# Altium PCB LedFlex.PcbDoc
Units mm, origin at the board's own origin, x right, y up, seen from the top; angles counter-clockwise.
Board outline 100 x 100 mm, 4 copper layers (Top Layer, 5V, GND, Bottom Layer), stack 0.603 mm thick; 100 components, 204 nets, 800 pads, 0 vias.
Unrouted connection lines stored in the file: 596.
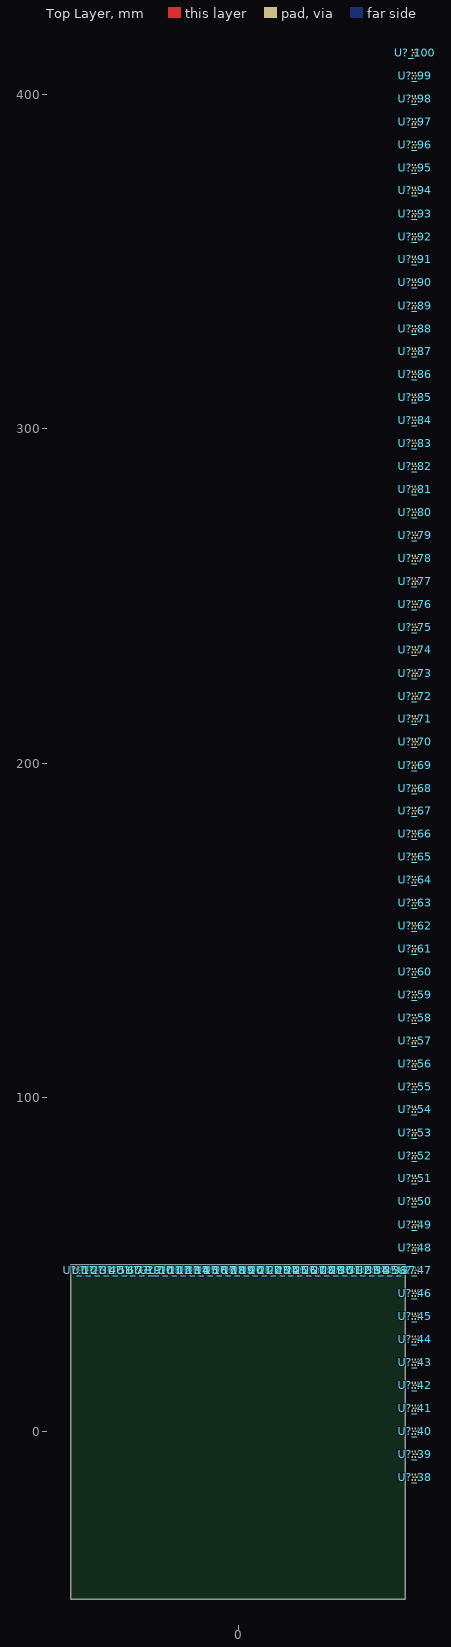
[diagram p0: Top Layer view]
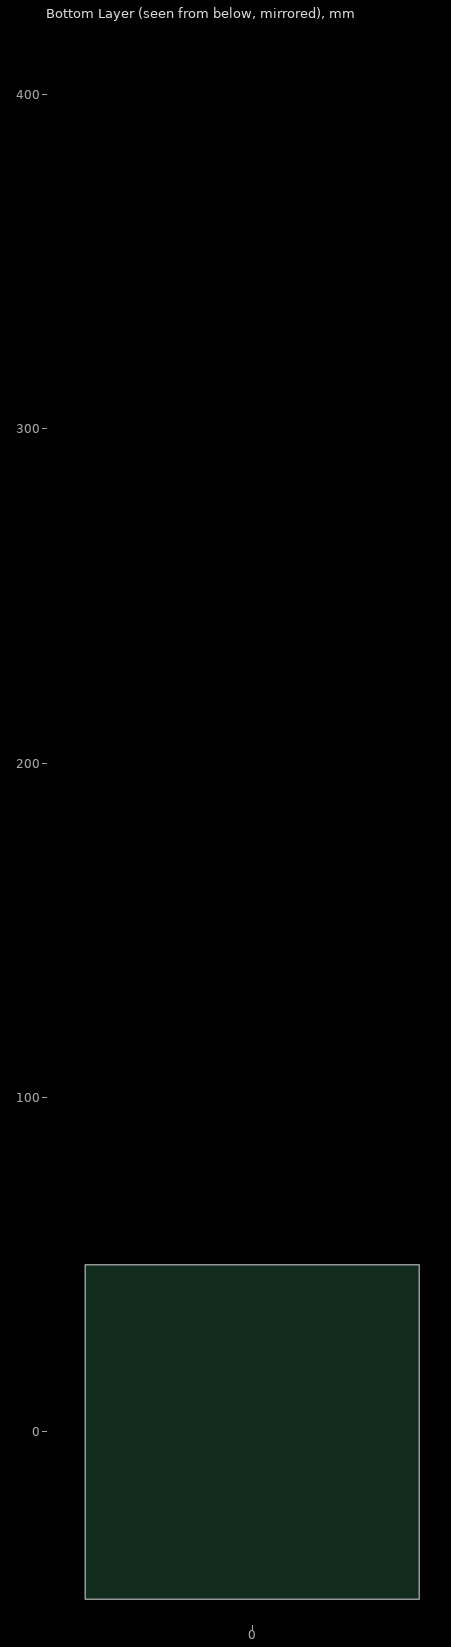
[diagram p1: Bottom Layer view, seen from below]

## Layer stack, top to bottom
Top Solder: solder mask 0.0102, Solder Resist, Dk 3.5
Top Layer: signal copper 0.0356
Dielectric 2: prepreg 0.0711, PP-006, Dk 4.1
5V: signal copper 0.035
Dielectric 1: dielectric 0.32, FR-4, Dk 4.8
GND: signal copper 0.035
Dielectric 3: prepreg 0.0711, PP-006, Dk 4.1
Bottom Layer: signal copper 0.0356
Bottom Solder: solder mask 0.0102, Solder Resist, Dk 3.5

## Board outline
-50,-50 -50,50 50,50 50,-50

## Design rules (kind name [scope] priority, off if disabled: settings)
BoardOutlineClearance [All] p1: gap=0.512 ignorepadtopadclearanceinfootprint=FALSE
Clearance [All] p1: gap=0.1 ignorepadtopadclearanceinfootprint=TRUE except(0: Arc-Hole Track-Hole SMDPad-Hole THPad-Hole Via-Hole Fill-Hole Poly-Hole Region-Hole Text-Hole)
HoleSize [All] p1: absolutevalues=TRUE maxlimit=15 minlimit=0.025 maxpercent=80.000 minpercent=20.000
PolygonConnect [IsPolygon and not IsNamedPolygon('PolygonDirect')] p1: thpad.connectstyle=Relief thpad.reliefconductorwidth=0.254 thpad.reliefentries=4 thpad.polygonreliefangle="90 Angle" thpad.airgapwidth=0.254 smdpad.connectstyle=Relief smdpad.reliefconductorwidth=0.254 smdpad.reliefentries=4 smdpad.polygonreliefangle="90 Angle" smdpad.airgapwidth=0.254 via.connectstyle=Direct via.reliefconductorwidth=0.254 via.reliefentries=4 via.polygonreliefangle="90 Angle" via.airgapwidth=0.254
PolygonConnect PolygonDirect [(IsNamedPolygon('PolygonDirect'))] p2: connectstyle=Direct reliefconductorwidth=0.254 reliefentries=4 polygonreliefangle="90 Angle" airgapwidth=0.254
RoutingVias [All] p1: holewidth=0.35 width=0.7 viastyle="Through Hole" minholewidth=0.3 minwidth=0.4 maxholewidth=2 maxwidth=2.5
SilkToSilkClearance [All] p1: silktosilkclearance=0.1
SolderMaskExpansion [All] p1: expansion=0.102 istentingtop=FALSE
SupplyNets "Schematic Supply Nets_1" [InNet('5V')] p1: voltage=0.000
SupplyNets "Schematic Supply Nets" [InNet('GND')] p2: voltage=0.000
Width [All] p1: maxlimit=5 minlimit=0.128 preferedwidth=0.254
28 further rules are at their usual default settings.

## Classes and differential pairs
component class U_APA102100: U?_100
component class U_APA10299: U?_99
component class U_APA10298: U?_98
component class U_APA10297: U?_97
component class U_APA10296: U?_96
component class U_APA10295: U?_95
component class U_APA10294: U?_94
component class U_APA10293: U?_93
component class U_APA10292: U?_92
component class U_APA10291: U?_91
component class U_APA10290: U?_90
component class U_APA10289: U?_89
component class U_APA10288: U?_88
component class U_APA10287: U?_87
component class U_APA10286: U?_86
component class U_APA10285: U?_85
component class U_APA10284: U?_84
component class U_APA10283: U?_83
component class U_APA10282: U?_82
component class U_APA10281: U?_81
component class U_APA10280: U?_80
component class U_APA10279: U?_79
component class U_APA10278: U?_78
component class U_APA10277: U?_77
component class U_APA10276: U?_76
component class U_APA10275: U?_75
component class U_APA10274: U?_74
component class U_APA10273: U?_73
component class U_APA10272: U?_72
component class U_APA10271: U?_71
component class U_APA10270: U?_70
component class U_APA10269: U?_69
component class U_APA10268: U?_68
component class U_APA10267: U?_67
component class U_APA10266: U?_66
component class U_APA10265: U?_65
component class U_APA10264: U?_64
component class U_APA10263: U?_63
component class U_APA10262: U?_62
component class U_APA10261: U?_61
component class U_APA10260: U?_60
component class U_APA10259: U?_59
component class U_APA10258: U?_58
component class U_APA10257: U?_57
component class U_APA10256: U?_56
component class U_APA10255: U?_55
component class U_APA10254: U?_54
component class U_APA10253: U?_53
component class U_APA10252: U?_52
component class U_APA10251: U?_51
component class U_APA10250: U?_50
component class U_APA10249: U?_49
component class U_APA10248: U?_48
component class U_APA10247: U?_47
component class U_APA10246: U?_46
component class U_APA10245: U?_45
component class U_APA10244: U?_44
component class U_APA10243: U?_43
component class U_APA10242: U?_42
component class U_APA10241: U?_41
component class U_APA10240: U?_40
component class U_APA10239: U?_39
component class U_APA10238: U?_38
component class U_APA10237: U?_37
component class U_APA10236: U?_36
component class U_APA10235: U?_35
component class U_APA10234: U?_34
component class U_APA10233: U?_33
net class DI_A[2..100]: DI_A2 DI_A3 DI_A4 DI_A5 DI_A6 DI_A7 DI_A8 DI_A9 DI_A10 DI_A11 DI_A12 DI_A13 DI_A14 DI_A15 DI_A16 DI_A17 DI_A18 DI_A19 DI_A20 DI_A21 DI_A22 DI_A23 DI_A24 DI_A25 DI_A26 DI_A27 DI_A28 DI_A29 DI_A30 DI_A31 DI_A32 DI_A33 DI_A34 DI_A35 DI_A36 DI_A37 DI_A38 DI_A39 DI_A40 DI_A41 DI_A42 DI_A43 DI_A44 DI_A45 DI_A46 DI_A47 DI_A48 DI_A49 DI_A50 DI_A51 DI_A52 DI_A53 DI_A54 DI_A55 DI_A56 DI_A57 DI_A58 DI_A59 DI_A60 DI_A61 DI_A62 DI_A63 DI_A64 DI_A65 DI_A66 DI_A67 DI_A68 DI_A69 DI_A70 DI_A71 DI_A72 DI_A73 DI_A74 DI_A75 DI_A76 DI_A77 DI_A78 DI_A79 DI_A80 DI_A81 DI_A82 DI_A83 DI_A84 DI_A85 DI_A86 DI_A87 DI_A88 DI_A89 DI_A90 DI_A91 DI_A92 DI_A93 DI_A94 DI_A95 DI_A96 DI_A97 DI_A98 DI_A99 DI_A100
net class CI_A[2..100]: CI_A2 CI_A3 CI_A4 CI_A5 CI_A6 CI_A7 CI_A8 CI_A9 CI_A10 CI_A11 CI_A12 CI_A13 CI_A14 CI_A15 CI_A16 CI_A17 CI_A18 CI_A19 CI_A20 CI_A21 CI_A22 CI_A23 CI_A24 CI_A25 CI_A26 CI_A27 CI_A28 CI_A29 CI_A30 CI_A31 CI_A32 CI_A33 CI_A34 CI_A35 CI_A36 CI_A37 CI_A38 CI_A39 CI_A40 CI_A41 CI_A42 CI_A43 CI_A44 CI_A45 CI_A46 CI_A47 CI_A48 CI_A49 CI_A50 CI_A51 CI_A52 CI_A53 CI_A54 CI_A55 CI_A56 CI_A57 CI_A58 CI_A59 CI_A60 CI_A61 CI_A62 CI_A63 CI_A64 CI_A65 CI_A66 CI_A67 CI_A68 CI_A69 CI_A70 CI_A71 CI_A72 CI_A73 CI_A74 CI_A75 CI_A76 CI_A77 CI_A78 CI_A79 CI_A80 CI_A81 CI_A82 CI_A83 CI_A84 CI_A85 CI_A86 CI_A87 CI_A88 CI_A89 CI_A90 CI_A91 CI_A92 CI_A93 CI_A94 CI_A95 CI_A96 CI_A97 CI_A98 CI_A99 CI_A100
channel class APA102: U_APA1021 U_APA1022 U_APA1023 U_APA1024 U_APA1025 U_APA1026 U_APA1027 U_APA1028 U_APA1029 U_APA10210 U_APA10211 U_APA10212 U_APA10213 U_APA10214 U_APA10215 U_APA10216 U_APA10217 U_APA10218 U_APA10219 U_APA10220 U_APA10221 U_APA10222 U_APA10223 U_APA10224 U_APA10225 U_APA10226 U_APA10227 U_APA10228 U_APA10229 U_APA10230 U_APA10231 U_APA10232 U_APA10233 U_APA10234 U_APA10235 U_APA10236 U_APA10237 U_APA10238 U_APA10239 U_APA10240 U_APA10241 U_APA10242 U_APA10243 U_APA10244 U_APA10245 U_APA10246 U_APA10247 U_APA10248 U_APA10249 U_APA10250 U_APA10251 U_APA10252 U_APA10253 U_APA10254 U_APA10255 U_APA10256 U_APA10257 U_APA10258 U_APA10259 U_APA10260 U_APA10261 U_APA10262 U_APA10263 U_APA10264 U_APA10265 U_APA10266 U_APA10267 U_APA10268 U_APA10269 U_APA10270 U_APA10271 U_APA10272 U_APA10273 U_APA10274 U_APA10275 U_APA10276 U_APA10277 U_APA10278 U_APA10279 U_APA10280 U_APA10281 U_APA10282 U_APA10283 U_APA10284 U_APA10285 U_APA10286 U_APA10287 U_APA10288 U_APA10289 U_APA10290 U_APA10291 U_APA10292 U_APA10293 U_APA10294 U_APA10295 U_APA10296 U_APA10297 U_APA10298 U_APA10299 U_APA102100
component class U_APA10232: U?_32
component class U_APA10231: U?_31
component class U_APA10230: U?_30
component class U_APA10229: U?_29
component class U_APA10228: U?_28
component class U_APA10227: U?_27
component class U_APA10226: U?_26
component class U_APA10225: U?_25
component class U_APA10224: U?_24
component class U_APA10223: U?_23
component class U_APA10222: U?_22
component class U_APA10221: U?_21
component class U_APA10220: U?_20
component class U_APA10219: U?_19
component class U_APA10218: U?_18
component class U_APA10217: U?_17
component class U_APA10216: U?_16
component class U_APA10215: U?_15
component class U_APA10214: U?_14
component class U_APA10213: U?_13
component class U_APA10212: U?_12
component class U_APA10211: U?_11
component class U_APA10210: U?_10
component class U_APA1029: U?_9
component class U_APA1028: U?_8
component class U_APA1027: U?_7
component class U_APA1026: U?_6
component class U_APA1025: U?_5
component class U_APA1024: U?_4
component class U_APA1023: U?_3
component class U_APA1022: U?_2
component class U_APA1021: U?_1

## Components (designator, comment, footprint, x,y, rotation, side; value= is the part's Value field where it differs from the comment)
U?_1 "APA 102 2020" LED_APA-102-2020-256-8 -48.3,48.3 r180 top (schematic designator U?)
U?_2 "APA 102 2020" LED_APA-102-2020-256-8 -45.617,48.3 r180 top (schematic designator U?)
U?_3 "APA 102 2020" LED_APA-102-2020-256-8 -42.933,48.3 r180 top (schematic designator U?)
U?_4 "APA 102 2020" LED_APA-102-2020-256-8 -40.25,48.3 r180 top (schematic designator U?)
U?_5 "APA 102 2020" LED_APA-102-2020-256-8 -37.567,48.3 r180 top (schematic designator U?)
U?_6 "APA 102 2020" LED_APA-102-2020-256-8 -34.883,48.3 r180 top (schematic designator U?)
U?_7 "APA 102 2020" LED_APA-102-2020-256-8 -32.2,48.3 r180 top (schematic designator U?)
U?_8 "APA 102 2020" LED_APA-102-2020-256-8 -29.517,48.3 r180 top (schematic designator U?)
U?_9 "APA 102 2020" LED_APA-102-2020-256-8 -26.833,48.3 r180 top (schematic designator U?)
U?_10 "APA 102 2020" LED_APA-102-2020-256-8 -24.15,48.3 r180 top (schematic designator U?)
U?_11 "APA 102 2020" LED_APA-102-2020-256-8 -21.467,48.3 r180 top (schematic designator U?)
U?_12 "APA 102 2020" LED_APA-102-2020-256-8 -18.783,48.3 r180 top (schematic designator U?)
U?_13 "APA 102 2020" LED_APA-102-2020-256-8 -16.1,48.3 r180 top (schematic designator U?)
U?_14 "APA 102 2020" LED_APA-102-2020-256-8 -13.417,48.3 r180 top (schematic designator U?)
U?_15 "APA 102 2020" LED_APA-102-2020-256-8 -10.733,48.3 r180 top (schematic designator U?)
U?_16 "APA 102 2020" LED_APA-102-2020-256-8 -8.05,48.3 r180 top (schematic designator U?)
U?_17 "APA 102 2020" LED_APA-102-2020-256-8 -5.367,48.3 r180 top (schematic designator U?)
U?_18 "APA 102 2020" LED_APA-102-2020-256-8 -2.683,48.3 r180 top (schematic designator U?)
U?_19 "APA 102 2020" LED_APA-102-2020-256-8 0,48.3 r180 top (schematic designator U?)
U?_20 "APA 102 2020" LED_APA-102-2020-256-8 2.683,48.3 r180 top (schematic designator U?)
U?_21 "APA 102 2020" LED_APA-102-2020-256-8 5.367,48.3 r180 top (schematic designator U?)
U?_22 "APA 102 2020" LED_APA-102-2020-256-8 8.05,48.3 r180 top (schematic designator U?)
U?_23 "APA 102 2020" LED_APA-102-2020-256-8 10.733,48.3 r180 top (schematic designator U?)
U?_24 "APA 102 2020" LED_APA-102-2020-256-8 13.417,48.3 r180 top (schematic designator U?)
U?_25 "APA 102 2020" LED_APA-102-2020-256-8 16.1,48.3 r180 top (schematic designator U?)
U?_26 "APA 102 2020" LED_APA-102-2020-256-8 18.783,48.3 r180 top (schematic designator U?)
U?_27 "APA 102 2020" LED_APA-102-2020-256-8 21.467,48.3 r180 top (schematic designator U?)
U?_28 "APA 102 2020" LED_APA-102-2020-256-8 24.15,48.3 r180 top (schematic designator U?)
U?_29 "APA 102 2020" LED_APA-102-2020-256-8 26.833,48.3 r180 top (schematic designator U?)
U?_30 "APA 102 2020" LED_APA-102-2020-256-8 29.517,48.3 r180 top (schematic designator U?)
U?_31 "APA 102 2020" LED_APA-102-2020-256-8 32.2,48.3 r180 top (schematic designator U?)
U?_32 "APA 102 2020" LED_APA-102-2020-256-8 34.883,48.3 r180 top (schematic designator U?)
U?_33 "APA 102 2020" LED_APA-102-2020-256-8 37.567,48.3 r180 top (schematic designator U?)
U?_34 "APA 102 2020" LED_APA-102-2020-256-8 40.25,48.3 r180 top (schematic designator U?)
U?_35 "APA 102 2020" LED_APA-102-2020-256-8 42.933,48.3 r180 top (schematic designator U?)
U?_36 "APA 102 2020" LED_APA-102-2020-256-8 45.617,48.3 r180 top (schematic designator U?)
U?_37 "APA 102 2020" LED_APA-102-2020-256-8 48.3,48.3 r180 top (schematic designator U?)
U?_38 "APA 102 2020" LED_APA-102-2020-256-8 53,-13.6 r90 top (schematic designator U?)
U?_39 "APA 102 2020" LED_APA-102-2020-256-8 53,-6.7 r90 top (schematic designator U?)
U?_40 "APA 102 2020" LED_APA-102-2020-256-8 53,0.2 r90 top (schematic designator U?)
U?_41 "APA 102 2020" LED_APA-102-2020-256-8 53,7.1 r90 top (schematic designator U?)
U?_42 "APA 102 2020" LED_APA-102-2020-256-8 53,13.9 r90 top (schematic designator U?)
U?_43 "APA 102 2020" LED_APA-102-2020-256-8 53,20.8 r90 top (schematic designator U?)
U?_44 "APA 102 2020" LED_APA-102-2020-256-8 53,27.7 r90 top (schematic designator U?)
U?_45 "APA 102 2020" LED_APA-102-2020-256-8 53,34.5 r90 top (schematic designator U?)
U?_46 "APA 102 2020" LED_APA-102-2020-256-8 53,41.4 r90 top (schematic designator U?)
U?_47 "APA 102 2020" LED_APA-102-2020-256-8 53,48.3 r90 top (schematic designator U?)
U?_48 "APA 102 2020" LED_APA-102-2020-256-8 53,55.1 r90 top (schematic designator U?)
U?_49 "APA 102 2020" LED_APA-102-2020-256-8 53,62 r90 top (schematic designator U?)
U?_50 "APA 102 2020" LED_APA-102-2020-256-8 53,68.9 r90 top (schematic designator U?)
U?_51 "APA 102 2020" LED_APA-102-2020-256-8 53,75.8 r90 top (schematic designator U?)
U?_52 "APA 102 2020" LED_APA-102-2020-256-8 53,82.6 r90 top (schematic designator U?)
U?_53 "APA 102 2020" LED_APA-102-2020-256-8 53,89.5 r90 top (schematic designator U?)
U?_54 "APA 102 2020" LED_APA-102-2020-256-8 53,96.4 r90 top (schematic designator U?)
U?_55 "APA 102 2020" LED_APA-102-2020-256-8 53,103.2 r90 top (schematic designator U?)
U?_56 "APA 102 2020" LED_APA-102-2020-256-8 53,110.1 r90 top (schematic designator U?)
U?_57 "APA 102 2020" LED_APA-102-2020-256-8 53,117 r90 top (schematic designator U?)
U?_58 "APA 102 2020" LED_APA-102-2020-256-8 53,123.8 r90 top (schematic designator U?)
U?_59 "APA 102 2020" LED_APA-102-2020-256-8 53,130.7 r90 top (schematic designator U?)
U?_60 "APA 102 2020" LED_APA-102-2020-256-8 53,137.6 r90 top (schematic designator U?)
U?_61 "APA 102 2020" LED_APA-102-2020-256-8 53,144.5 r90 top (schematic designator U?)
U?_62 "APA 102 2020" LED_APA-102-2020-256-8 53,151.299 r90 top (schematic designator U?)
U?_63 "APA 102 2020" LED_APA-102-2020-256-8 53,158.199 r90 top (schematic designator U?)
U?_64 "APA 102 2020" LED_APA-102-2020-256-8 53,165.099 r90 top (schematic designator U?)
U?_65 "APA 102 2020" LED_APA-102-2020-256-8 53,171.899 r90 top (schematic designator U?)
U?_66 "APA 102 2020" LED_APA-102-2020-256-8 53,178.799 r90 top (schematic designator U?)
U?_67 "APA 102 2020" LED_APA-102-2020-256-8 53,185.699 r90 top (schematic designator U?)
U?_68 "APA 102 2020" LED_APA-102-2020-256-8 53,192.499 r90 top (schematic designator U?)
U?_69 "APA 102 2020" LED_APA-102-2020-256-8 53,199.399 r90 top (schematic designator U?)
U?_70 "APA 102 2020" LED_APA-102-2020-256-8 53,206.299 r90 top (schematic designator U?)
U?_71 "APA 102 2020" LED_APA-102-2020-256-8 53,213.199 r90 top (schematic designator U?)
U?_72 "APA 102 2020" LED_APA-102-2020-256-8 53,219.999 r90 top (schematic designator U?)
U?_73 "APA 102 2020" LED_APA-102-2020-256-8 53,226.899 r90 top (schematic designator U?)
U?_74 "APA 102 2020" LED_APA-102-2020-256-8 53,233.799 r90 top (schematic designator U?)
U?_75 "APA 102 2020" LED_APA-102-2020-256-8 53,240.599 r90 top (schematic designator U?)
U?_76 "APA 102 2020" LED_APA-102-2020-256-8 53,247.499 r90 top (schematic designator U?)
U?_77 "APA 102 2020" LED_APA-102-2020-256-8 53,254.399 r90 top (schematic designator U?)
U?_78 "APA 102 2020" LED_APA-102-2020-256-8 53,261.199 r90 top (schematic designator U?)
U?_79 "APA 102 2020" LED_APA-102-2020-256-8 53,268.099 r90 top (schematic designator U?)
U?_80 "APA 102 2020" LED_APA-102-2020-256-8 53,274.999 r90 top (schematic designator U?)
U?_81 "APA 102 2020" LED_APA-102-2020-256-8 53,281.899 r90 top (schematic designator U?)
U?_82 "APA 102 2020" LED_APA-102-2020-256-8 53,288.699 r90 top (schematic designator U?)
U?_83 "APA 102 2020" LED_APA-102-2020-256-8 53,295.599 r90 top (schematic designator U?)
U?_84 "APA 102 2020" LED_APA-102-2020-256-8 53,302.499 r90 top (schematic designator U?)
U?_85 "APA 102 2020" LED_APA-102-2020-256-8 53,309.299 r90 top (schematic designator U?)
U?_86 "APA 102 2020" LED_APA-102-2020-256-8 53,316.199 r90 top (schematic designator U?)
U?_87 "APA 102 2020" LED_APA-102-2020-256-8 53,323.099 r90 top (schematic designator U?)
U?_88 "APA 102 2020" LED_APA-102-2020-256-8 53,329.899 r90 top (schematic designator U?)
U?_89 "APA 102 2020" LED_APA-102-2020-256-8 53,336.799 r90 top (schematic designator U?)
U?_90 "APA 102 2020" LED_APA-102-2020-256-8 53,343.699 r90 top (schematic designator U?)
U?_91 "APA 102 2020" LED_APA-102-2020-256-8 53,350.599 r90 top (schematic designator U?)
U?_92 "APA 102 2020" LED_APA-102-2020-256-8 53,357.399 r90 top (schematic designator U?)
U?_93 "APA 102 2020" LED_APA-102-2020-256-8 53,364.299 r90 top (schematic designator U?)
U?_94 "APA 102 2020" LED_APA-102-2020-256-8 53,371.199 r90 top (schematic designator U?)
U?_95 "APA 102 2020" LED_APA-102-2020-256-8 53,377.999 r90 top (schematic designator U?)
U?_96 "APA 102 2020" LED_APA-102-2020-256-8 53,384.899 r90 top (schematic designator U?)
U?_97 "APA 102 2020" LED_APA-102-2020-256-8 53,391.799 r90 top (schematic designator U?)
U?_98 "APA 102 2020" LED_APA-102-2020-256-8 53,398.599 r90 top (schematic designator U?)
U?_99 "APA 102 2020" LED_APA-102-2020-256-8 53,405.499 r90 top (schematic designator U?)
U?_100 "APA 102 2020" LED_APA-102-2020-256-8 53,412.399 r90 top (schematic designator U?)

## Footprints (in the part's own frame and the unit in brackets; to place one, negate y for a bottom-side part, rotate by r counter-clockwise, add the part's x,y. Pads: shape width x height; smd on the part's side, far side on the other; paste and mask are expansions set on the pad)
LED_APA-102-2020-256-8 [mm]
  rect 0.65x0.45 smd: 1(-0.8,0.9) 2(-0.8,0) 3(-0.8,-0.9) 4(0.8,-0.9) 5(0.8,0) 6(0.8,0.9)
  rect 0.45x0.8 smd: 7(0,-0.4)
  rect 0.45x0.5 smd: 8(0,0.575)
  body extent -1,-1 1,1, height 0.9

## Part data
U?_1 U?_2 U?_3 U?_4 U?_5 U?_6 U?_7 U?_8 U?_9 U?_10 U?_11 U?_12 U?_13 U?_14 U?_15 U?_16 U?_17 U?_18 U?_19 U?_20 U?_21 U?_22 U?_23 U?_24 U?_25 U?_26 U?_27 U?_28 U?_29 U?_30 U?_31 U?_32 U?_33 U?_34 U?_35 U?_36 U?_37 U?_38 U?_39 U?_40 U?_41 U?_42 U?_43 U?_44 U?_45 U?_46 U?_47 U?_48 U?_49 U?_50 U?_51 U?_52 U?_53 U?_54 U?_55 U?_56 U?_57 U?_58 U?_59 U?_60 U?_61 U?_62 U?_63 U?_64 U?_65 U?_66 U?_67 U?_68 U?_69 U?_70 U?_71 U?_72 U?_73 U?_74 U?_75 U?_76 U?_77 U?_78 U?_79 U?_80 U?_81 U?_82 U?_83 U?_84 U?_85 U?_86 U?_87 U?_88 U?_89 U?_90 U?_91 U?_92 U?_93 U?_94 U?_95 U?_96 U?_97 U?_98 U?_99 U?_100: library part APA-102-2020-256-8, "8-pin type LED three-color RGB Dimming control", Package="SMD-8 iPixel LED Light Co.", Availability=Unavailable, MF="iPixel LED Light Co.", MP=APA-102-2020-256-8, Price=None, SnapEDA_Link=https://www.snapeda.com/parts/APA-102-2020-256-8/iPixel%20LED%20Light%20Co./view-part/698331/?ref=snap

## Nets (pads, with @x,y where several pads share a name; then routed paths per layer and width w, separated by ;. In a path a pad name is that pad's centre, name@x,y a point inside that pad or via, vN(x,y) a via of type N, cw(c..) or ccw(c..) an arc to the next point about the centre after c; other vN are vias at no path point)
5V: U?_1.1 U?_1.8 U?_2.1 U?_2.8 U?_3.1 U?_3.8 U?_4.1 U?_4.8 U?_5.1 U?_5.8 U?_6.1 U?_6.8 U?_7.1 U?_7.8 U?_8.1 U?_8.8 U?_9.1 U?_9.8 U?_10.1 U?_10.8 U?_11.1 U?_11.8 U?_12.1 U?_12.8 U?_13.1 U?_13.8 U?_14.1 U?_14.8 U?_15.1 U?_15.8 U?_16.1 U?_16.8 U?_17.1 U?_17.8 U?_18.1 U?_18.8 U?_19.1 U?_19.8 U?_20.1 U?_20.8 U?_21.1 U?_21.8 U?_22.1 U?_22.8 U?_23.1 U?_23.8 U?_24.1 U?_24.8 U?_25.1 U?_25.8 U?_26.1 U?_26.8 U?_27.1 U?_27.8 U?_28.1 U?_28.8 U?_29.1 U?_29.8 U?_30.1 U?_30.8 U?_31.1 U?_31.8 U?_32.1 U?_32.8 U?_33.1 U?_33.8 U?_34.1 U?_34.8 U?_35.1 U?_35.8 U?_36.1 U?_36.8 U?_37.1 U?_37.8 U?_38.1 U?_38.8 U?_39.1 U?_39.8 U?_40.1 U?_40.8 U?_41.1 U?_41.8 U?_42.1 U?_42.8 U?_43.1 U?_43.8 U?_44.1 U?_44.8 U?_45.1 U?_45.8 U?_46.1 U?_46.8 U?_47.1 U?_47.8 U?_48.1 U?_48.8 U?_49.1 U?_49.8 U?_50.1 U?_50.8 U?_51.1 U?_51.8 U?_52.1 U?_52.8 U?_53.1 U?_53.8 U?_54.1 U?_54.8 U?_55.1 U?_55.8 U?_56.1 U?_56.8 U?_57.1 U?_57.8 U?_58.1 U?_58.8 U?_59.1 U?_59.8 U?_60.1 U?_60.8 U?_61.1 U?_61.8 U?_62.1 U?_62.8 U?_63.1 U?_63.8 U?_64.1 U?_64.8 U?_65.1 U?_65.8 U?_66.1 U?_66.8 U?_67.1 U?_67.8 U?_68.1 U?_68.8 U?_69.1 U?_69.8 U?_70.1 U?_70.8 U?_71.1 U?_71.8 U?_72.1 U?_72.8 U?_73.1 U?_73.8 U?_74.1 U?_74.8 U?_75.1 U?_75.8 U?_76.1 U?_76.8 U?_77.1 U?_77.8 U?_78.1 U?_78.8 U?_79.1 U?_79.8 U?_80.1 U?_80.8 U?_81.1 U?_81.8 U?_82.1 U?_82.8 U?_83.1 U?_83.8 U?_84.1 U?_84.8 U?_85.1 U?_85.8 U?_86.1 U?_86.8 U?_87.1 U?_87.8 U?_88.1 U?_88.8 U?_89.1 U?_89.8 U?_90.1 U?_90.8 U?_91.1 U?_91.8 U?_92.1 U?_92.8 U?_93.1 U?_93.8 U?_94.1 U?_94.8 U?_95.1 U?_95.8 U?_96.1 U?_96.8 U?_97.1 U?_97.8 U?_98.1 U?_98.8 U?_99.1 U?_99.8 U?_100.1 U?_100.8
CI_A1: U?_1.5
CI_A2: U?_1.2 U?_2.5
CI_A3: U?_2.2 U?_3.5
CI_A4: U?_3.2 U?_4.5
CI_A5: U?_4.2 U?_5.5
CI_A6: U?_5.2 U?_6.5
CI_A7: U?_6.2 U?_7.5
CI_A8: U?_7.2 U?_8.5
CI_A9: U?_8.2 U?_9.5
CI_A10: U?_9.2 U?_10.5
CI_A11: U?_10.2 U?_11.5
CI_A12: U?_11.2 U?_12.5
CI_A13: U?_12.2 U?_13.5
CI_A14: U?_13.2 U?_14.5
CI_A15: U?_14.2 U?_15.5
CI_A16: U?_15.2 U?_16.5
CI_A17: U?_16.2 U?_17.5
CI_A18: U?_17.2 U?_18.5
CI_A19: U?_18.2 U?_19.5
CI_A20: U?_19.2 U?_20.5
CI_A21: U?_20.2 U?_21.5
CI_A22: U?_21.2 U?_22.5
CI_A23: U?_22.2 U?_23.5
CI_A24: U?_23.2 U?_24.5
CI_A25: U?_24.2 U?_25.5
CI_A26: U?_25.2 U?_26.5
CI_A27: U?_26.2 U?_27.5
CI_A28: U?_27.2 U?_28.5
CI_A29: U?_28.2 U?_29.5
CI_A30: U?_29.2 U?_30.5
CI_A31: U?_30.2 U?_31.5
CI_A32: U?_31.2 U?_32.5
CI_A33: U?_32.2 U?_33.5
CI_A34: U?_33.2 U?_34.5
CI_A35: U?_34.2 U?_35.5
CI_A36: U?_35.2 U?_36.5
CI_A37: U?_36.2 U?_37.5
CI_A38: U?_37.2 U?_38.5
CI_A39: U?_38.2 U?_39.5
CI_A40: U?_39.2 U?_40.5
CI_A41: U?_40.2 U?_41.5
CI_A42: U?_41.2 U?_42.5
CI_A43: U?_42.2 U?_43.5
CI_A44: U?_43.2 U?_44.5
CI_A45: U?_44.2 U?_45.5
CI_A46: U?_45.2 U?_46.5
CI_A47: U?_46.2 U?_47.5
CI_A48: U?_47.2 U?_48.5
CI_A49: U?_48.2 U?_49.5
CI_A50: U?_49.2 U?_50.5
CI_A51: U?_50.2 U?_51.5
CI_A52: U?_51.2 U?_52.5
CI_A53: U?_52.2 U?_53.5
CI_A54: U?_53.2 U?_54.5
CI_A55: U?_54.2 U?_55.5
CI_A56: U?_55.2 U?_56.5
CI_A57: U?_56.2 U?_57.5
CI_A58: U?_57.2 U?_58.5
CI_A59: U?_58.2 U?_59.5
CI_A60: U?_59.2 U?_60.5
CI_A61: U?_60.2 U?_61.5
CI_A62: U?_61.2 U?_62.5
CI_A63: U?_62.2 U?_63.5
CI_A64: U?_63.2 U?_64.5
CI_A65: U?_64.2 U?_65.5
CI_A66: U?_65.2 U?_66.5
CI_A67: U?_66.2 U?_67.5
CI_A68: U?_67.2 U?_68.5
CI_A69: U?_68.2 U?_69.5
CI_A70: U?_69.2 U?_70.5
CI_A71: U?_70.2 U?_71.5
CI_A72: U?_71.2 U?_72.5
CI_A73: U?_72.2 U?_73.5
CI_A74: U?_73.2 U?_74.5
CI_A75: U?_74.2 U?_75.5
CI_A76: U?_75.2 U?_76.5
CI_A77: U?_76.2 U?_77.5
CI_A78: U?_77.2 U?_78.5
CI_A79: U?_78.2 U?_79.5
CI_A80: U?_79.2 U?_80.5
CI_A81: U?_80.2 U?_81.5
CI_A82: U?_81.2 U?_82.5
CI_A83: U?_82.2 U?_83.5
CI_A84: U?_83.2 U?_84.5
CI_A85: U?_84.2 U?_85.5
CI_A86: U?_85.2 U?_86.5
CI_A87: U?_86.2 U?_87.5
CI_A88: U?_87.2 U?_88.5
CI_A89: U?_88.2 U?_89.5
CI_A90: U?_89.2 U?_90.5
CI_A91: U?_90.2 U?_91.5
CI_A92: U?_91.2 U?_92.5
CI_A93: U?_92.2 U?_93.5
CI_A94: U?_93.2 U?_94.5
CI_A95: U?_94.2 U?_95.5
CI_A96: U?_95.2 U?_96.5
CI_A97: U?_96.2 U?_97.5
CI_A98: U?_97.2 U?_98.5
CI_A99: U?_98.2 U?_99.5
CI_A100: U?_99.2 U?_100.5
CO_A100: U?_100.2
DI_A1: U?_1.4
DI_A2: U?_1.3 U?_2.4
DI_A3: U?_2.3 U?_3.4
DI_A4: U?_3.3 U?_4.4
DI_A5: U?_4.3 U?_5.4
DI_A6: U?_5.3 U?_6.4
DI_A7: U?_6.3 U?_7.4
DI_A8: U?_7.3 U?_8.4
DI_A9: U?_8.3 U?_9.4
DI_A10: U?_9.3 U?_10.4
DI_A11: U?_10.3 U?_11.4
DI_A12: U?_11.3 U?_12.4
DI_A13: U?_12.3 U?_13.4
DI_A14: U?_13.3 U?_14.4
DI_A15: U?_14.3 U?_15.4
DI_A16: U?_15.3 U?_16.4
DI_A17: U?_16.3 U?_17.4
DI_A18: U?_17.3 U?_18.4
DI_A19: U?_18.3 U?_19.4
DI_A20: U?_19.3 U?_20.4
DI_A21: U?_20.3 U?_21.4
DI_A22: U?_21.3 U?_22.4
DI_A23: U?_22.3 U?_23.4
DI_A24: U?_23.3 U?_24.4
DI_A25: U?_24.3 U?_25.4
DI_A26: U?_25.3 U?_26.4
DI_A27: U?_26.3 U?_27.4
DI_A28: U?_27.3 U?_28.4
DI_A29: U?_28.3 U?_29.4
DI_A30: U?_29.3 U?_30.4
DI_A31: U?_30.3 U?_31.4
DI_A32: U?_31.3 U?_32.4
DI_A33: U?_32.3 U?_33.4
DI_A34: U?_33.3 U?_34.4
DI_A35: U?_34.3 U?_35.4
DI_A36: U?_35.3 U?_36.4
DI_A37: U?_36.3 U?_37.4
DI_A38: U?_37.3 U?_38.4
DI_A39: U?_38.3 U?_39.4
DI_A40: U?_39.3 U?_40.4
DI_A41: U?_40.3 U?_41.4
DI_A42: U?_41.3 U?_42.4
DI_A43: U?_42.3 U?_43.4
DI_A44: U?_43.3 U?_44.4
DI_A45: U?_44.3 U?_45.4
DI_A46: U?_45.3 U?_46.4
DI_A47: U?_46.3 U?_47.4
DI_A48: U?_47.3 U?_48.4
DI_A49: U?_48.3 U?_49.4
DI_A50: U?_49.3 U?_50.4
DI_A51: U?_50.3 U?_51.4
DI_A52: U?_51.3 U?_52.4
DI_A53: U?_52.3 U?_53.4
DI_A54: U?_53.3 U?_54.4
DI_A55: U?_54.3 U?_55.4
DI_A56: U?_55.3 U?_56.4
DI_A57: U?_56.3 U?_57.4
DI_A58: U?_57.3 U?_58.4
DI_A59: U?_58.3 U?_59.4
DI_A60: U?_59.3 U?_60.4
DI_A61: U?_60.3 U?_61.4
DI_A62: U?_61.3 U?_62.4
DI_A63: U?_62.3 U?_63.4
DI_A64: U?_63.3 U?_64.4
DI_A65: U?_64.3 U?_65.4
DI_A66: U?_65.3 U?_66.4
DI_A67: U?_66.3 U?_67.4
DI_A68: U?_67.3 U?_68.4
DI_A69: U?_68.3 U?_69.4
DI_A70: U?_69.3 U?_70.4
DI_A71: U?_70.3 U?_71.4
DI_A72: U?_71.3 U?_72.4
DI_A73: U?_72.3 U?_73.4
DI_A74: U?_73.3 U?_74.4
DI_A75: U?_74.3 U?_75.4
DI_A76: U?_75.3 U?_76.4
DI_A77: U?_76.3 U?_77.4
DI_A78: U?_77.3 U?_78.4
DI_A79: U?_78.3 U?_79.4
DI_A80: U?_79.3 U?_80.4
DI_A81: U?_80.3 U?_81.4
DI_A82: U?_81.3 U?_82.4
DI_A83: U?_82.3 U?_83.4
DI_A84: U?_83.3 U?_84.4
DI_A85: U?_84.3 U?_85.4
DI_A86: U?_85.3 U?_86.4
DI_A87: U?_86.3 U?_87.4
DI_A88: U?_87.3 U?_88.4
DI_A89: U?_88.3 U?_89.4
DI_A90: U?_89.3 U?_90.4
DI_A91: U?_90.3 U?_91.4
DI_A92: U?_91.3 U?_92.4
DI_A93: U?_92.3 U?_93.4
DI_A94: U?_93.3 U?_94.4
DI_A95: U?_94.3 U?_95.4
DI_A96: U?_95.3 U?_96.4
DI_A97: U?_96.3 U?_97.4
DI_A98: U?_97.3 U?_98.4
DI_A99: U?_98.3 U?_99.4
DI_A100: U?_99.3 U?_100.4
DO_A100: U?_100.3
GND: U?_1.6 U?_1.7 U?_2.6 U?_2.7 U?_3.6 U?_3.7 U?_4.6 U?_4.7 U?_5.6 U?_5.7 U?_6.6 U?_6.7 U?_7.6 U?_7.7 U?_8.6 U?_8.7 U?_9.6 U?_9.7 U?_10.6 U?_10.7 U?_11.6 U?_11.7 U?_12.6 U?_12.7 U?_13.6 U?_13.7 U?_14.6 U?_14.7 U?_15.6 U?_15.7 U?_16.6 U?_16.7 U?_17.6 U?_17.7 U?_18.6 U?_18.7 U?_19.6 U?_19.7 U?_20.6 U?_20.7 U?_21.6 U?_21.7 U?_22.6 U?_22.7 U?_23.6 U?_23.7 U?_24.6 U?_24.7 U?_25.6 U?_25.7 U?_26.6 U?_26.7 U?_27.6 U?_27.7 U?_28.6 U?_28.7 U?_29.6 U?_29.7 U?_30.6 U?_30.7 U?_31.6 U?_31.7 U?_32.6 U?_32.7 U?_33.6 U?_33.7 U?_34.6 U?_34.7 U?_35.6 U?_35.7 U?_36.6 U?_36.7 U?_37.6 U?_37.7 U?_38.6 U?_38.7 U?_39.6 U?_39.7 U?_40.6 U?_40.7 U?_41.6 U?_41.7 U?_42.6 U?_42.7 U?_43.6 U?_43.7 U?_44.6 U?_44.7 U?_45.6 U?_45.7 U?_46.6 U?_46.7 U?_47.6 U?_47.7 U?_48.6 U?_48.7 U?_49.6 U?_49.7 U?_50.6 U?_50.7 U?_51.6 U?_51.7 U?_52.6 U?_52.7 U?_53.6 U?_53.7 U?_54.6 U?_54.7 U?_55.6 U?_55.7 U?_56.6 U?_56.7 U?_57.6 U?_57.7 U?_58.6 U?_58.7 U?_59.6 U?_59.7 U?_60.6 U?_60.7 U?_61.6 U?_61.7 U?_62.6 U?_62.7 U?_63.6 U?_63.7 U?_64.6 U?_64.7 U?_65.6 U?_65.7 U?_66.6 U?_66.7 U?_67.6 U?_67.7 U?_68.6 U?_68.7 U?_69.6 U?_69.7 U?_70.6 U?_70.7 U?_71.6 U?_71.7 U?_72.6 U?_72.7 U?_73.6 U?_73.7 U?_74.6 U?_74.7 U?_75.6 U?_75.7 U?_76.6 U?_76.7 U?_77.6 U?_77.7 U?_78.6 U?_78.7 U?_79.6 U?_79.7 U?_80.6 U?_80.7 U?_81.6 U?_81.7 U?_82.6 U?_82.7 U?_83.6 U?_83.7 U?_84.6 U?_84.7 U?_85.6 U?_85.7 U?_86.6 U?_86.7 U?_87.6 U?_87.7 U?_88.6 U?_88.7 U?_89.6 U?_89.7 U?_90.6 U?_90.7 U?_91.6 U?_91.7 U?_92.6 U?_92.7 U?_93.6 U?_93.7 U?_94.6 U?_94.7 U?_95.6 U?_95.7 U?_96.6 U?_96.7 U?_97.6 U?_97.7 U?_98.6 U?_98.7 U?_99.6 U?_99.7 U?_100.6 U?_100.7

## Silkscreen, mask and mechanical layers (free items; w line width, h text height)
Board Shape:
  the board outline again, w0.254